# EAGLE board iMX233-OLinuXino-NANO (EAGLE 4.16), part 1 of 2
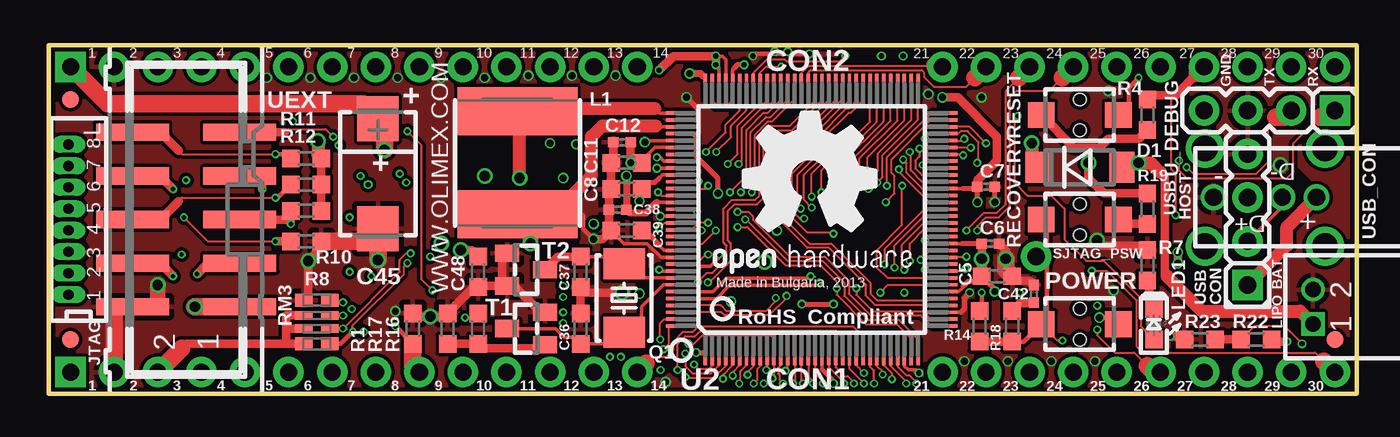
[diagram p0: board, top side]
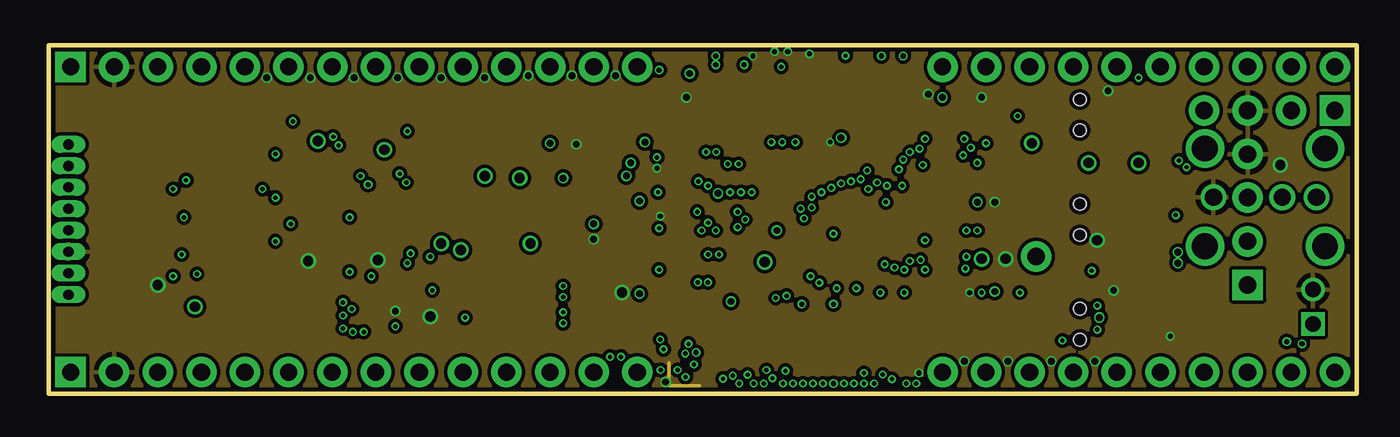
[diagram p1: board, inner layer Route2]
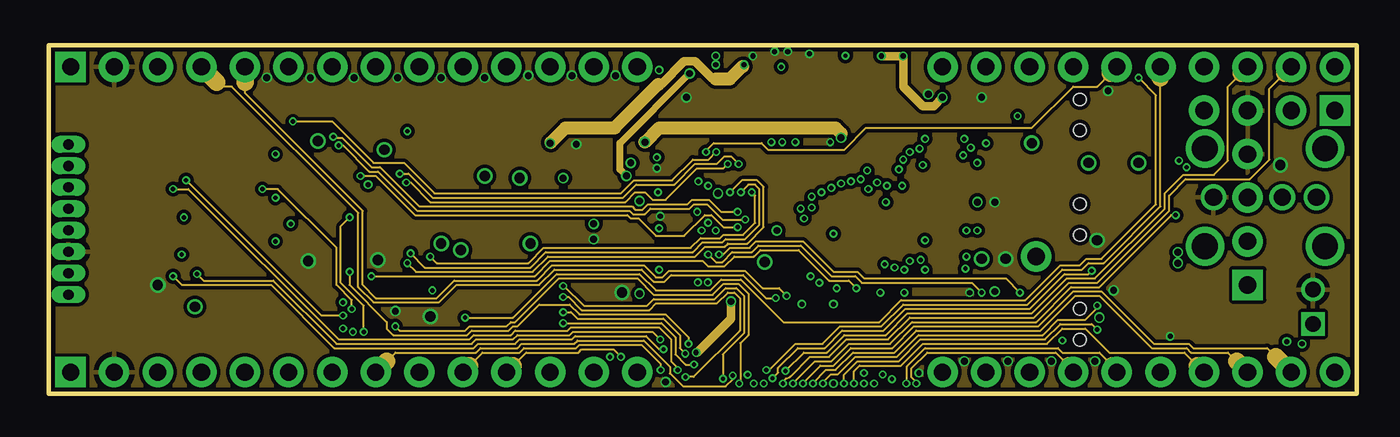
[diagram p2: board, inner layer Route3]
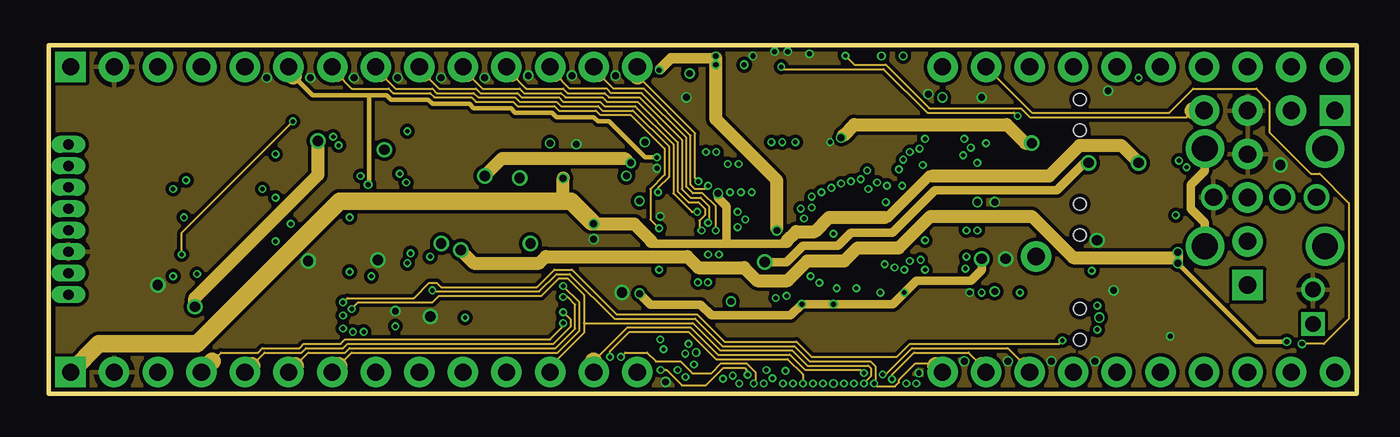
[diagram p3: board, inner layer Route14]
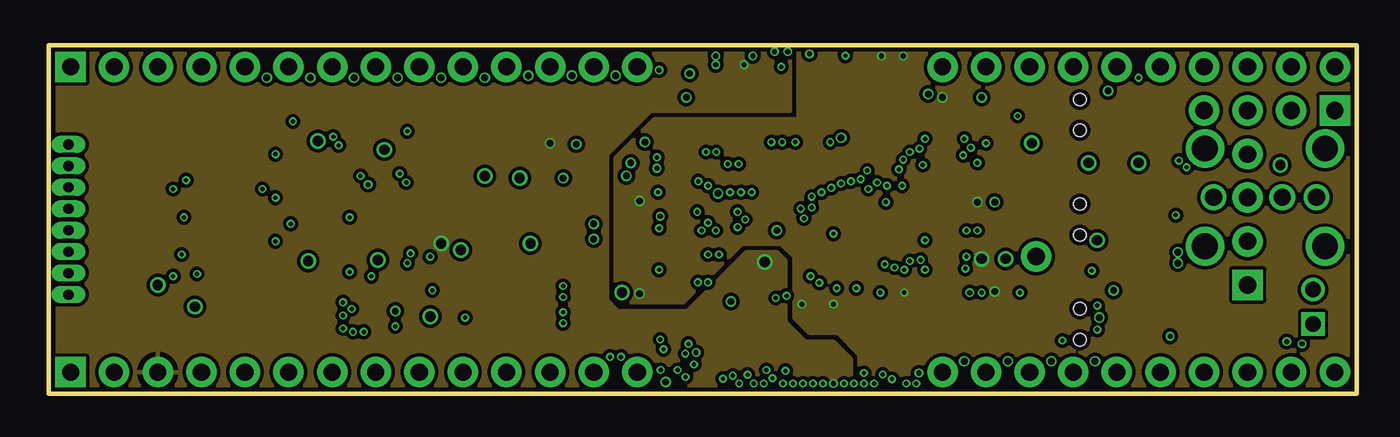
[diagram p4: board, inner layer Route15]
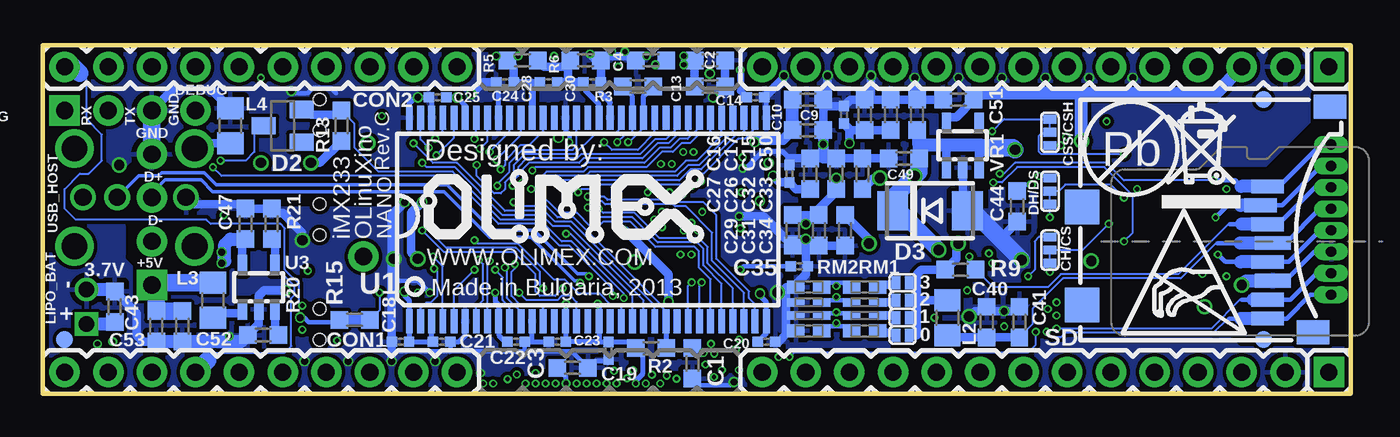
[diagram p5: board, bottom side, seen from below]

Size 76.2 x 20.32 mm. Coordinates in mm from the lower left corner, seen from the top.
Outline: 0,0 76.2,0 76.2,20.32 0,20.32 0,0
Copper layers (1*2+3*14+15*16): Top 0.035mm / dielectric 0.13mm / Route2 0.035mm / dielectric 0.6mm / Route3 0.035mm / dielectric 0.13mm / Route14 0.035mm / dielectric 0.6mm / Route15 0.035mm / dielectric 0.13mm / Bottom 0.035mm
Design rules "default": minimum track width 5mil, minimum drill 10mil, track to track 5mil, track to pad 5mil, pad to pad 5mil, via to via 5mil, smd to smd 1mil, copper to edge 10mil, drill to drill 8mil, minimum pad ring 5mil, minimum via ring 4mil, stop-mask expansion 4mil, vias tented up to drill 25mil, thermal gap 12mil
tRestrict: 2 lines
bRestrict: 49 lines

## Footprints (pad centres in the part's own frame; a part is rotated, then mirrored left to right if it is on the bottom)
SJ_1_SMALLER = smd 0.508 x 0.762: 1 -0.381,0; 2 0.381,0
C0603_DWS = smd 1.016 x 1.016: 1 -0.889,0; 2 0.889,0
C0402_TI = smd 0.61 x 0.584: 1 -0.508,0; 2 0.508,0
CT7343 = smd 2.6 x 2.4: + -3.2,0; - 3.2,0
SJ_2_SMALLER_12_TIED = smd 0.508 x 0.762: 1 -0.762,0; 2 0,0; 3 0.762,0
HN1X30_WITHOUT(15-20) = drill 1 pad 1.778 square: 1 -36.83,0 | drill 1 pad 1.778 round: 2 -34.29,0; 3 -31.75,0; 4 -29.21,0; 5 -26.67,0; 6 -24.13,0; 7 -21.59,0; 8 -19.05,0; 9 -16.51,0; 10 -13.97,0; 11 -11.43,0; 12 -8.89,0; 13 -6.35,0; 14 -3.81,0; 21 13.97,0; 22 16.51,0; 23 19.05,0; 24 21.59,0; 25 24.13,0; 26 26.67,0; 27 29.21,0; 28 31.75,0; 29 34.29,0; 30 36.83,0
SJ_2_SMALLER = smd 0.508 x 0.762: 1 -0.762,0; 2 0,0; 3 0.762,0
MLL-41 = smd 1.45 x 1.8: A 2.445,0; K -2.445,0
SOT23C = smd 1 x 1.4: 1 -0.95,-1.1; 2 0.95,-1.1; 3 0,1.1
DO214AA = smd 1.778 x 2.286: A 2.177,0; C -2.177,0
WU08S = drill 0.6 pad 0.991 long: 1 -4.375,0; 2 -3.125,0; 3 -1.875,0; 4 -0.625,0; 5 0.625,0; 6 1.875,0; 7 3.125,0; 8 4.375,0
L7078 = smd 2.8 x 7: 1 -3,0; 2 3,0
L0805_5MIL_DWS = smd 1.27 x 1.524: 1 -1.016,0; 2 1.016,0
LED-0603 = smd 1.016 x 1.016: A 0.889,0; C -0.889,0
DW02R = drill 0.9 square: 1 -1,0 | drill 0.9 round: 2 1,0
IT1185AU2 = smd 1.55 x 1.5: 1 -2.25,0; 2 2.25,0 | hole 0.7: 0,-0.9; 0,0.9
HCX-4S = smd 1.8 x 2.4: 1 -2,0; 2 2,0
R0603_5MIL_DWS = smd 1.016 x 1.016: 1 -0.889,0; 2 0.889,0
0603_0R = smd 1.016 x 1.016: 1 -0.889,0; 2 0.889,0
R_MATRIX_4 = smd 1.016 x 0.762: 1.1 -0.762,1.27; 1.2 0.762,1.27; 4.1 -0.762,-1.27; 4.2 0.762,-1.27 | smd 1.016 x 0.508: 2.1 -0.762,0.381; 2.2 0.762,0.381; 3.1 -0.762,-0.381; 3.2 0.762,-0.381
TFR/C-MEM-CON = smd 0.8 x 1.9: 1 -3.2,10.9; 2 -2.1,10.5; 3 -1,10.9; 5 1.2,10.9; 7 3.4,10.9; 8 4.5,10.9 | smd 0.8 x 2.1: 4 0.1,11.2; 6 2.3,11.2 | smd 2 x 2: 9 3.7,0.1; 10 -2,0.1 | smd 1.4 x 1.9: 11 5.3,13.55; 12 -7.85,14.55
TESTPAD = drill 1.016 pad 1.778 round: P$1 0,0
SOT23 = smd 1 x 1.4: 1 -0.95,-1.1; 2 0.95,-1.1; 3 0,1.1
66TSOP-II = smd 0.4 x 1.4: 1 -10.4,-5.925; 2 -9.75,-5.925; 3 -9.1,-5.925; 4 -8.45,-5.925; 5 -7.8,-5.925; 6 -7.15,-5.925; 7 -6.5,-5.925; 8 -5.85,-5.925; 9 -5.2,-5.925; 10 -4.55,-5.925; 11 -3.9,-5.925; 12 -3.25,-5.925; 13 -2.6,-5.925; 14 -1.95,-5.925; 15 -1.3,-5.925; 16 -0.65,-5.925; 17 0,-5.925; 18 0.65,-5.925; 19 1.3,-5.925; 20 1.95,-5.925; 21 2.6,-5.925; 22 3.25,-5.925; 23 3.9,-5.925; 24 4.55,-5.925; 25 5.2,-5.925; 26 5.85,-5.925; 27 6.5,-5.925; 28 7.15,-5.925; 29 7.8,-5.925; 30 8.45,-5.925; 31 9.1,-5.925; 32 9.75,-5.925; 33 10.4,-5.925; 34 10.4,5.925; 35 9.75,5.925; 36 9.1,5.925; 37 8.45,5.925; 38 7.8,5.925; 39 7.15,5.925; 40 6.5,5.925; 41 5.85,5.925; 42 5.2,5.925; 43 4.55,5.925; 44 3.9,5.925; 45 3.25,5.925; 46 2.6,5.925; 47 1.95,5.925; 48 1.3,5.925; 49 0.65,5.925; 50 0,5.925; 51 -0.65,5.925; 52 -1.3,5.925; 53 -1.95,5.925; 54 -2.6,5.925; 55 -3.25,5.925; 56 -3.9,5.925; 57 -4.55,5.925; 58 -5.2,5.925; 59 -5.85,5.925; 60 -6.5,5.925; 61 -7.15,5.925; 62 -7.8,5.925; 63 -8.45,5.925; 64 -9.1,5.925; 65 -9.75,5.925; 66 -10.4,5.925
TQFP128LD = smd 0.2 x 1.5: 1 -6.2,-7.75; 2 -5.8,-7.75; 3 -5.4,-7.75; 4 -5,-7.75; 5 -4.6,-7.75; 6 -4.2,-7.75; 7 -3.8,-7.75; 8 -3.4,-7.75; 9 -3,-7.75; 10 -2.6,-7.75; 11 -2.2,-7.75; 12 -1.8,-7.75; 13 -1.4,-7.75; 14 -1,-7.75; 15 -0.6,-7.75; 16 -0.2,-7.75; 17 0.2,-7.75; 18 0.6,-7.75; 19 1,-7.75; 20 1.4,-7.75; 21 1.8,-7.75; 22 2.2,-7.75; 23 2.6,-7.75; 24 3,-7.75; 25 3.4,-7.75; 26 3.8,-7.75; 27 4.2,-7.75; 28 4.6,-7.75; 29 5,-7.75; 30 5.4,-7.75; 31 5.8,-7.75; 32 6.2,-7.75; 65 6.2,7.75; 66 5.8,7.75; 67 5.4,7.75; 68 5,7.75; 69 4.6,7.75; 70 4.2,7.75; 71 3.8,7.75; 72 3.4,7.75; 73 3,7.75; 74 2.6,7.75; 75 2.2,7.75; 76 1.8,7.75; 77 1.4,7.75; 78 1,7.75; 79 0.6,7.75; 80 0.2,7.75; 81 -0.2,7.75; 82 -0.6,7.75; 83 -1,7.75; 84 -1.4,7.75; 85 -1.8,7.75; 86 -2.2,7.75; 87 -2.6,7.75; 88 -3,7.75; 89 -3.4,7.75; 90 -3.8,7.75; 91 -4.2,7.75; 92 -4.6,7.75; 93 -5,7.75; 94 -5.4,7.75; 95 -5.8,7.75; 96 -6.2,7.75 | smd 1.5 x 0.2: 33 7.75,-6.2; 34 7.75,-5.8; 35 7.75,-5.4; 36 7.75,-5; 37 7.75,-4.6; 38 7.75,-4.2; 39 7.75,-3.8; 40 7.75,-3.4; 41 7.75,-3; 42 7.75,-2.6; 43 7.75,-2.2; 44 7.75,-1.8; 45 7.75,-1.4; 46 7.75,-1; 47 7.75,-0.6; 48 7.75,-0.2; 49 7.75,0.2; 50 7.75,0.6; 51 7.75,1; 52 7.75,1.4; 53 7.75,1.8; 54 7.75,2.2; 55 7.75,2.6; 56 7.75,3; 57 7.75,3.4; 58 7.75,3.8; 59 7.75,4.2; 60 7.75,4.6; 61 7.75,5; 62 7.75,5.4; 63 7.75,5.8; 64 7.75,6.2; 97 -7.75,6.2; 98 -7.75,5.8; 99 -7.75,5.4; 100 -7.75,5; 101 -7.75,4.6; 102 -7.75,4.2; 103 -7.75,3.8; 104 -7.75,3.4; 105 -7.75,3; 106 -7.75,2.6; 107 -7.75,2.2; 108 -7.75,1.8; 109 -7.75,1.4; 110 -7.75,1; 111 -7.75,0.6; 112 -7.75,0.2; 113 -7.75,-0.2; 114 -7.75,-0.6; 115 -7.75,-1; 116 -7.75,-1.4; 117 -7.75,-1.8; 118 -7.75,-2.2; 119 -7.75,-2.6; 120 -7.75,-3; 121 -7.75,-3.4; 122 -7.75,-3.8; 123 -7.75,-4.2; 124 -7.75,-4.6; 125 -7.75,-5; 126 -7.75,-5.4; 127 -7.75,-5.8; 128 -7.75,-6.2
SOT23-5 = smd 0.55 x 1.2: 1 -0.95,-1.3; 2 0,-1.3; 3 0.95,-1.3; 4 0.95,1.3; 5 -0.95,1.3
FIDUCIAL-1X2 = smd 1 x 1: 1 0,0
HN1X4 = drill 1 pad 1.778 square: 1 -3.81,0 | drill 1 pad 1.778 round: 2 -1.27,0; 3 1.27,0; 4 3.81,0
ML10_S = smd 1 x 4.25: 1 -5.08,-3.125; 2 -5.08,3.125; 3 -2.54,-3.125; 4 -2.54,3.125; 5 0,-3.125; 6 0,3.125; 7 2.54,-3.125; 8 2.54,3.125; 9 5.08,-3.125; 10 5.08,3.125
USB_A_VERTICAL_PTH = drill 1 round: 1 3.45,12.75; 2 3.45,14.75; 3 3.45,16.75; 4 3.45,18.75 | drill 1.5 round: P$1 0.6,12.25; P$2 6.3,12.25; P$3 6.3,19.25; P$4 0.6,19.25
SOT-23-5 = smd 0.55 x 1.2: 1 -0.95,-1.3; 2 0,-1.3; 3 0.95,-1.3; 4 0.95,1.3; 5 -0.95,1.3

## Placement (x,y rotation side)
0  Close  [SJ_1_SMALLER]  26.11,3.43 0 bottom
1  Open  [SJ_1_SMALLER]  26.11,4.45 0 bottom
2  Open  [SJ_1_SMALLER]  26.11,5.46 0 bottom
3  Close  [SJ_1_SMALLER]  26.11,6.48 0 bottom
C1  22uF/6.3V  [C0603_DWS]  38.35,1.78 90 bottom
C2  22uF/6.3V  [C0603_DWS]  37.34,19.43 180 bottom
C3  22uF/6.3V  [C0603_DWS]  45.34,1.52 180 bottom
C4  22uF/6.3V  [C0603_DWS]  40.77,19.43 0 bottom
C5  22uF/6.3V  [C0603_DWS]  55.24,6.86 180 top
C6  100nF  [C0402_TI]  54.86,8.76 180 top
C7  100nF  [C0402_TI]  54.61,12.06 180 top
C8  22uF/6.3V  [C0603_DWS]  33.66,11.94 0 top
C9  22uF/6.3V  [C0603_DWS]  31.62,17.14 180 bottom
C10  22uF/6.3V  [C0603_DWS]  31.62,15.37 180 bottom
C11  22uF/6.3V  [C0603_DWS]  33.66,13.46 0 top
C12  100nF  [C0402_TI]  33.4,14.67 0 top
C13  22uF/6.3V  [C0603_DWS]  37.34,17.91 180 bottom
C14  100nF  [C0402_TI]  34.67,17.27 180 bottom
C15  22uF/6.3V  [C0603_DWS]  26.8,16.26 270 bottom
C16  100nF  [C0402_TI]  29.53,16.26 270 bottom
C17  22uF/6.3V  [C0603_DWS]  28.32,16.26 270 bottom
C18  100nF  [C0402_TI]  55.37,3.05 0 bottom
C19  100nF  [C0402_TI]  43.24,2.53 90 bottom
C20  100nF  [C0402_TI]  34.04,3.05 180 bottom
C21  100nF  [C0402_TI]  52.96,3.05 180 bottom
C22  100nF  [C0402_TI]  48.64,3.05 180 bottom
C23  100nF  [C0402_TI]  46.23,3.05 0 bottom
C24  100nF  [C0402_TI]  49.28,18.16 0 bottom
C25  100nF  [C0402_TI]  53.21,17.27 0 bottom
C26  22uF/6.3V  [C0603_DWS]  31.5,12.83 270 bottom
C27  100nF  [C0402_TI]  32.7,12.83 270 bottom
C28  100nF  [C0402_TI]  46.74,18.16 0 bottom
C29  22uF/6.3V  [C0603_DWS]  32.51,9.53 90 bottom
C30  100nF  [C0402_TI]  44.2,18.16 180 bottom
C31  22uF/6.3V  [C0603_DWS]  30.99,9.53 90 bottom
C32  22uF/6.3V  [C0603_DWS]  29.97,12.83 270 bottom
C33  NA(10pF)  [C0603_DWS]  28.45,12.83 270 bottom
C34  100pF  [C0603_DWS]  29.46,9.53 90 bottom
C35  100nF  [C0402_TI]  32.13,7.43 180 bottom
C36  4.7pF  [C0603_DWS]  30.99,3.81 270 top
C37  4.7pF  [C0603_DWS]  30.99,7.11 90 top
C38  100nF  [C0402_TI]  33.15,10.73 0 top
C39  1uF  [C0603_DWS]  33.66,9.53 0 top
C40  22uF/6.3V  [C0603_DWS]  21.21,4.19 270 bottom
C41  22uF/6.3V  [C0603_DWS]  19.3,4.19 270 bottom
C42  100nF  [C0402_TI]  57.4,5.84 90 top
C43  22uF/6.3V  [C0603_DWS]  72.01,5.08 90 bottom
C44  47pF  [C0603_DWS]  19.43,10.92 270 bottom
C45  220uF/10V/TANT  [CT7343]  19.18,12.83 270 top
C47  100nF  [C0603_DWS]  64.39,9.91 90 bottom
C48  22uF/6.3V  [C0603_DWS]  25.02,7.11 270 top
C49  22uF/6.3V  [C0603_DWS]  26.04,13.72 180 bottom
C50  22uF/6.3V  [C0603_DWS]  25.27,16.26 90 bottom
C51  22uF/6.3V  [C0603_DWS]  22.86,17.14 180 bottom
C52  22uF/6.3V  [C0603_DWS]  68.07,3.94 270 bottom
C53  22uF/6.3V  [C0603_DWS]  69.6,3.94 270 bottom
CH/CS  SCL_HW:Close/SCL_SW:Open  [SJ_2_SMALLER_12_TIED]  17.53,8.38 90 bottom
CON1  HN1X30_WITHOUT(15-20)  [HN1X30_WITHOUT(15-20)]  38.1,1.27 180 bottom
CON2  HN1X30_WITHOUT(15-20)  [HN1X30_WITHOUT(15-20)]  38.1,19.05 180 bottom
CSS/CSH  CS_SW:Open/CS_HW:Close  [SJ_2_SMALLER]  17.53,15.24 90 bottom
D1  1N5819/SS14  [MLL-41]  60.07,13.21 0 top
D2  BAT54C  [SOT23C]  62.23,15.62 90 bottom
D3  SMBJ6.0A  [DO214AA]  24.51,10.67 0 bottom
DH/DS  SDA_HW:Close/SDA_SW:Open  [SJ_2_SMALLER_12_TIED]  17.53,11.81 90 bottom
JTAG  NA(WU08S)  [WU08S]  1.14,10.16 90 top
L1  22uH/1.5A/YS75/7x8mm  [L7078]  27.3,13.46 90 top
L2  CL470nH/0805/1.76R/250mA  [L0805_5MIL_DWS]  23.5,4.45 270 bottom
L3  FB0805/600R/2A  [L0805_5MIL_DWS]  66.29,5.46 270 bottom
L4  FB0805/600R/200mA(201209-601)  [L0805_5MIL_DWS]  65.28,15.62 270 bottom
LED1  GREEN(0603)  [LED-0603]  64.39,4.06 270 top
LIPO_BAT  CON2DW02R  [DW02R]  73.66,5.08 90 top
POWER  SW-TAKTIT1185AU2  [IT1185AU2]  60.07,4.06 180 top
Q1  4SB24.000F20E15/5x3.2mm/20ppm/20pF  [HCX-4S]  33.53,5.59 270 top
R1  NA(47k)  [R0603_5MIL_DWS]  21.21,3.81 270 top
R2  10k  [R0603_5MIL_DWS]  40.77,2.67 180 bottom
R3  NA(120R)  [R0603_5MIL_DWS]  41.53,17.91 0 bottom
R4  47k  [R0603_5MIL_DWS]  64.01,16.26 90 top
R5  1k/1%  [R0603_5MIL_DWS]  48.26,19.43 180 bottom
R6  1k/1%  [R0603_5MIL_DWS]  44.58,19.43 180 bottom
R7  2.2k  [R0603_5MIL_DWS]  64.01,7.49 270 top
R8  1M  [R0603_5MIL_DWS]  14.99,8.89 0 top
R9  10k  [R0603_5MIL_DWS]  22.73,7.24 180 bottom
R10  2.2k  [R0603_5MIL_DWS]  14.99,10.67 0 top
R11  47k  [R0603_5MIL_DWS]  14.99,13.72 0 top
R12  2.2k  [R0603_5MIL_DWS]  14.99,12.19 0 top
R13  4.7k  [R0603_5MIL_DWS]  58.8,15.62 90 bottom
R14  1k/1%  [R0603_5MIL_DWS]  54.23,3.94 270 top
R15  0R(Board_Mounted)  [0603_0R]  58.04,4.32 0 bottom
R16  2.2k  [R0603_5MIL_DWS]  25.02,3.81 90 top
R17  2.2k  [R0603_5MIL_DWS]  23.24,3.81 90 top
R18  1k/1%  [R0603_5MIL_DWS]  56.13,3.94 270 top
R19  10k  [R0603_5MIL_DWS]  64.01,10.79 90 top
R20  10k  [R0603_5MIL_DWS]  63.37,3.43 0 bottom
R21  10k  [R0603_5MIL_DWS]  62.87,9.91 270 bottom
R22  NA(22k)  [R0603_5MIL_DWS]  70.36,3.17 0 top
R23  NA(33k)  [R0603_5MIL_DWS]  67.06,3.17 0 top
RECOVERY  SW-TAKTIT1185AU2  [IT1185AU2]  60.07,10.16 180 top
RESET  SW-TAKTIT1185AU2  [IT1185AU2]  60.07,16.26 180 top
RM1  RA1206_(4X0603)_4B8_4.7K  [R_MATRIX_4]  28.32,4.95 180 bottom
RM2  RA1206_(4X0603)_4B8_47K  [R_MATRIX_4]  31.57,4.95 180 bottom
RM3  RA1206_(4X0603)_4B8_100K  [R_MATRIX_4]  15.62,4.19 0 top
SD  MICRO_SD/MMC_NEW  [TFR/C-MEM-CON]  15.75,8.89 270 bottom
SJTAG_PSW  TESTPAD40/70  [TESTPAD]  57.53,8 0 top
T1  BC846B  [SOT23]  27.81,3.81 90 top
T2  BC846B  [SOT23]  27.81,7.24 270 top
U1  HY5DU121622D(L)T(P)-J  [66TSOP-II]  44.45,10.16 0 bottom
U2  MCIMX233CAG4C  [TQFP128LD]  44.45,10.16 0 top
U3  SY6280  [SOT23-5]  63.63,6.22 0 bottom
U$1  FIDUCIAL1X2  [FIDUCIAL-1X2]  1.27,17.14 180 top
U$2  FIDUCIAL1X2  [FIDUCIAL-1X2]  74.93,3.17 180 top
U$3  FIDUCIAL1X2  [FIDUCIAL-1X2]  1.27,3.17 180 top
U$4  [ESD_SYMBOL]  13.28,3.55 0 bottom
U$6  [RECYCLE_BIN1/8]  10.99,10.82 0 bottom
U$7  FIDUCIAL1X2  [FIDUCIAL-1X2]  5.08,17.14 0 bottom
U$8  [OLIMEX1_V]  36.52,8.65 0 bottom
U$13  FIDUCIAL1X2  [FIDUCIAL-1X2]  5.08,3.17 0 bottom
U$14  FIDUCIAL1X2  [FIDUCIAL-1X2]  74.93,3.17 0 bottom
U$15  [PB]  12.81,14.3 0 bottom
U$18  [LOGO-OPENHARDWARE_8X8]  44.32,12.45 0 top
U_DEBUG  HN1X4  [HN1X4]  71.12,16.51 180 top
UEXT  GBH-SMT-10  [ML10_S]  8,10.16 90 top
USB_CON  HN1X4  [HN1X4]  69.85,10.16 90 top
USB_HOST  USB_SHIELDUSB_A_VERTICAL  [USB_A_VERTICAL_PTH]  86.61,8 90 top
VR1  AP1231-33  [SOT-23-5]  22.61,14.48 0 bottom

## Library data of the parts
0 1-3 CH/CS CSS/CSH DH/DS = jumper
C1-C45 C47-C53 L1-L4 R1-R14 R16-R23 = rcl
CON1 CON2 JTAG LIPO_BAT U_DEBUG USB_CON = Penko
D1 POWER RECOVERY RESET SJTAG_PSW = gogo
D2 T1 T2 = semicon-smd-ipc
D3 R15 RM1-RM3 VR1 = OLIMEX_DISCRET
LED1 = DOUBLE-SIDE
Q1 = crystal
SD USB_HOST = OLIMEX_CONNECTORS
U1-U3 = OLIMEX_IC
U$1-U$3 U$7 U$13 U$14 = SparkFunEagle-6-6-07
U$4 U$6 U$8 U$15 U$18 = olimex_logo1
UEXT = con-harting-ml

## Nets
+5V: C11.2 C12.2 C45.+ C47.1 C48.1 C49.1 C50.1 CON2.1 D3.C R22.2 U2.102 U3.5 VR1.1 VR1.3
+5V_HOST_PWR: C52.1 C53.1 L3.1 USB_CON.1 USB_HOST.1
+24V: C29.2 C31.2 C32.2 C43.1 CON1.1 D1.A LIPO_BAT.1 U2.100 U2.103
A0: U1.29 U2.76
A1: U1.30 U2.75
A2: U1.31 U2.74
A3: U1.32 U2.73
A4: U1.35 U2.72
A5: U1.36 U2.71
A6: U1.37 U2.70
A7: U1.38 U2.69
A8: U1.39 U2.68
A9: U1.40 U2.67
A10: U1.28 U2.66
A11: U1.41 U2.65
A12: U1.42 U2.64
AUART1_RXD: U2.128 UEXT.4
AUART1_TXD: U2.127 UEXT.3
BA0: U1.26 U2.79
BA1: U1.27 U2.80
CASN: U1.22 U2.61
CKE: U1.44 U2.78
CLK: R3.2 U1.45 U2.36
CLKN: R3.1 U1.46 U2.37
CS: R2.1 U1.24 U2.63
CS_UEXT: CSS/CSH.1 U2.32
CS_UEXT_GPIO: CSS/CSH.2 R11.1 UEXT.10
D0: U1.2 U2.41
D1: U1.4 U2.43
D2: U1.5 U2.42
D3: U1.7 U2.44
D4: U1.8 U2.47
D5: U1.10 U2.48
D6: U1.11 U2.49
D7: U1.13 U2.50
D8: U1.54 U2.51
D9: U1.56 U2.52
D10: U1.57 U2.54
D11: U1.59 U2.55
D12: U1.60 U2.57
D13: U1.62 U2.58
D14: U1.63 U2.60
D15: U1.65 U2.59
DCDC_VDDA: C26.2 C27.2 C38.2 U2.96 U2.110
DCDC_VDDD: C1.2 C2.2 C13.2 C14.2 U2.1 U2.93 U2.94
DEBUG: U2.89 U_DEBUG.4
DQM0: U1.20 U2.46
DQM1: U1.47 U2.56
DQS0: U1.16 U2.39
DQS1: U1.51 U2.40
GND [pwr-II]: C1.1 C2.1 C3.1 C4.1 C5.1 C6.1 C7.1 C8.1 C9.1 C10.1 C11.1 C12.1 C13.1 C14.1 C15.1 C16.1 C17.1 C18.1 C19.1 C20.1 C21.1 C22.1 C23.1 C24.1 C25.1 C26.1 C27.1 C29.1 C30.1 C31.1 C32.1 C33.1 C34.1 C35.1 C36.1 C37.1 C38.1 C39.1 C40.1 C41.1 C42.2 C43.2 C44.2 C45.- C47.2 C48.2 C49.2 C50.2 C51.2 C52.2 C53.2 CON1.2 CON2.2 D3.A JTAG.3 L4.1 LIPO_BAT.2 R1.1 R6.1 R7.1 R8.2 R17.2 R20.1 R21.1 R23.1 RM2.1.2 RM2.2.2 RM2.3.2 RM2.4.2 RM3.1.1 SD.6 T1.2 T2.1 T2.2 U1.6 U1.12 U1.34 U1.48 U1.52 U1.58 U1.64 U1.66 U2.30 U2.35 U2.98 U2.105 U2.112 U2.118 U3.2 U_DEBUG.3 UEXT.2 USB_CON.4 USB_HOST.4 VR1.2
HP_VGND: CON2.9 U2.111
HPL: CON2.7 U2.113
HPR: CON2.8 U2.109
I2C_SCL: CH/CS.2 R10.1 UEXT.5
I2C_SDA: DH/DS.2 R12.1 UEXT.6
LED1: LED1.A U2.88
LIN1_INL: CON2.10 U2.115
LIN1_INR: CON2.11 U2.114
N$1: POWER.1 R15.1
N$3: L3.2 U3.1
N$6: R20.2 U3.3
N$7: C28.2 C30.2 R5.1 R6.2 U1.49
N$9: R19.1 RECOVERY.1
N$11: D2.3 U_DEBUG.1
N$18: C33.2 L1.2 U2.97
N$19: C34.2 L1.1 U2.99
N$25: C39.2 U2.117
N$38: C42.1 R18.1
N$42: LED1.C R7.2
N$43: R16.1 R17.1 T1.1
N$101: 3.1 RM1.4.1
N$103: 2.1 RM1.3.1
N$104: 1.1 RM1.2.1
N$105: 0.1 RM1.1.1
N$266: L4.2 USB_HOST.P$3 USB_HOST.P$4
PIN1/LCD_D00: CON1.4 RM1.1.2 RM2.1.1 U2.2
PIN2/LCD_D01: CON1.5 RM1.2.2 RM2.2.1 U2.3
PIN3/LCD_D02: CON1.6 RM1.3.2 RM2.3.1 U2.4
PIN4/LCD_D03: CON1.7 RM1.4.2 RM2.4.1 U2.5
PIN5/LCD_D04: CON1.8 U2.6
PIN6/LCD_D05: CON1.9 R1.2 U2.7
PIN7/LCD_D06: CON1.10 U2.8
PIN8/LCD_D07: CON1.11 U2.9
PIN9/LCD_D08/SSP2_MISO: CON1.12 U2.22 UEXT.7
PIN10/LCD_D09: CON1.13 U2.23
PIN11/LCD_D10: CON1.14 U2.24
PIN12/LCD_D11: CON1.21 CSS/CSH.3 U2.25
PIN13/LCD_D12: CON1.22 U2.27
PIN14/LCD_D13: CON1.23 U2.26
PIN15/LCD_D14: CON1.24 U2.29
PIN16/LCD_D15: CON1.25 U2.28
PIN17/LCD_D16: CON1.26 U2.19
PIN18/LCD_D17/USB_EN: CON1.27 R21.2 U2.20 U3.4
PIN19/LCD_DOTCLK: CON2.30 U2.17
PIN20/LCD_VSYNC: CON1.28 U2.16
PIN21/LCD_HSYNC/I2C_SDA: CON1.29 DH/DS.1 U2.15
PIN22/LCD_EN/I2C_SCL: CH/CS.1 CON1.30 U2.11
PIN23/LCD_DISP: CON2.29 U2.12
PIN24/LCD_WR: CON2.28 U2.13
PIN25/LCD_RS: CON2.27 R4.2 U2.14
PIN26/LCD_CS: CON2.26 U2.10
PIN27/PWM2: CON2.25 U2.91
PIN28/SOFT_SDA: CON2.24 DH/DS.3 U2.31
PIN29/SOFT_SCL: CH/CS.3 CON2.23 U2.34
PIN30: CON2.22 R22.1 R23.2 U2.81
PIN31: CON2.21 U2.82
PIN32/LRADC1: CON2.14 U2.107
PIN33/LRADC0: CON2.13 U2.108
PIN34/MIC: CON2.12 U2.116
PSWITCH: R14.1 U2.119
PWM0/DUART_RXD: CON2.4 D2.2 R13.2 U2.125
PWM1/DUART_TXD: CON2.5 U2.126 U_DEBUG.2
RASN: U1.23 U2.62
RESET: R16.2 RESET.1
SD_VCC: C40.2 C41.2 JTAG.5 L2.2 SD.4
SJTAG_PSW: POWER.2 R14.2 R18.2 RECOVERY.2 RM3.1.2 SJTAG_PSW.P$1
SSP1_CMD: JTAG.6 R9.1 SD.3 U2.83
SSP1_DATA0: JTAG.2 RM3.3.2 SD.7 U2.84
SSP1_DATA1: JTAG.1 RM3.4.2 SD.8 U2.85
SSP1_DATA2: JTAG.8 RM3.2.2 SD.1 U2.86
SSP1_DATA3: JTAG.7 R8.1 SD.2 U2.87
SSP1_SCK: JTAG.4 SD.5 U2.90
SSP2_MOSI: U2.21 UEXT.8
SSP2_SCK: U2.33 UEXT.9
USB_DM: U2.123 USB_CON.2 USB_HOST.2
USB_DP: U2.124 USB_CON.3 USB_HOST.3
V+: C5.2 C6.2 C7.2 C8.2 C18.2 C19.2 C20.2 C21.2 C22.2 C23.2 C24.2 C25.2 C28.1 R2.2 R5.2 U1.1 U1.3 U1.9 U1.15 U1.18 U1.33 U1.55 U1.61 U2.38 U2.45 U2.53 U2.106
VCC [pwr-II]: 0.2 1.2 2.2 3.2 C3.2 C4.2 C15.2 C16.2 C17.2 CON1.3 L2.1 R4.1 R9.2 R13.1 R19.2 RESET.2 RM3.2.1 RM3.3.1 RM3.4.1 U2.18 U2.92 U2.95
VDAC1: C44.1 CON2.6 U2.104
VDD4P2: C9.2 C10.2 D1.K U2.101
VDDXTAL: C35.2 R15.2 U2.120
VPP: C51.1 CON2.3 R10.2 R11.2 R12.2 UEXT.1 VR1.5
WEN: U1.21 U2.77
XTALI: C36.2 Q1.2 T1.3 U2.122
XTALO: C37.2 Q1.1 T2.3 U2.121